# Altium PCB Sensor_Box_Water_Meter_Valve.PCBDOC (part 1 of 2)
Units mil, origin at the board's own origin, x right, y up, seen from the top; angles counter-clockwise.
Board outline 842.52 x 2866.14 mil, 2 copper layers (Top, Bot), stack 63.824 mil thick; 67 components, 54 nets, 224 pads, 112 vias.
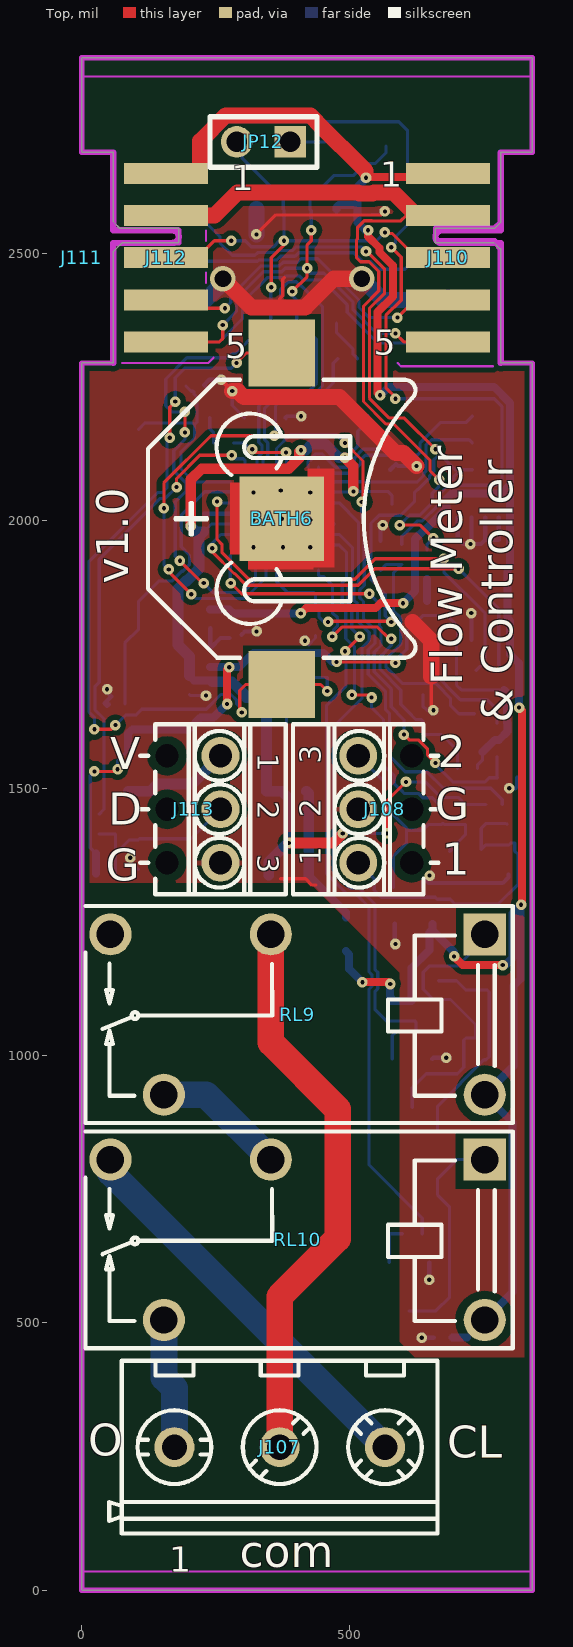
[diagram p0: Top view]
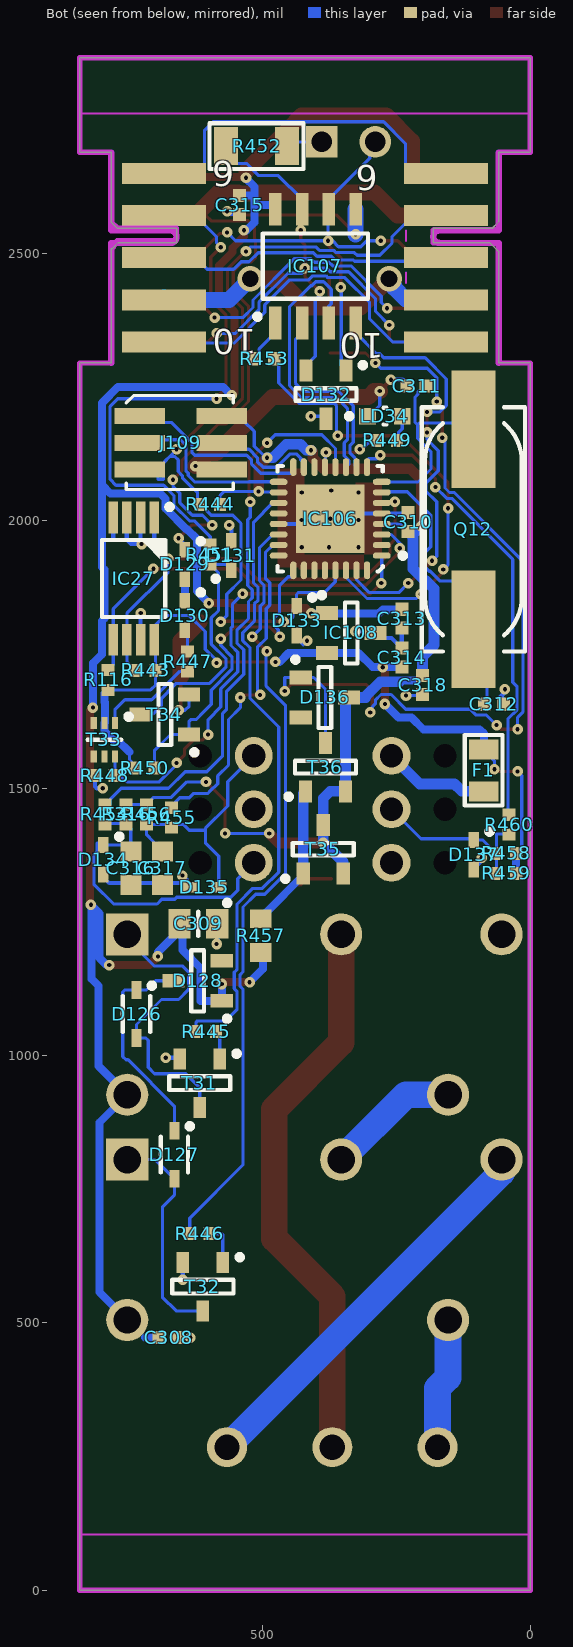
[diagram p1: Bot view, seen from below]
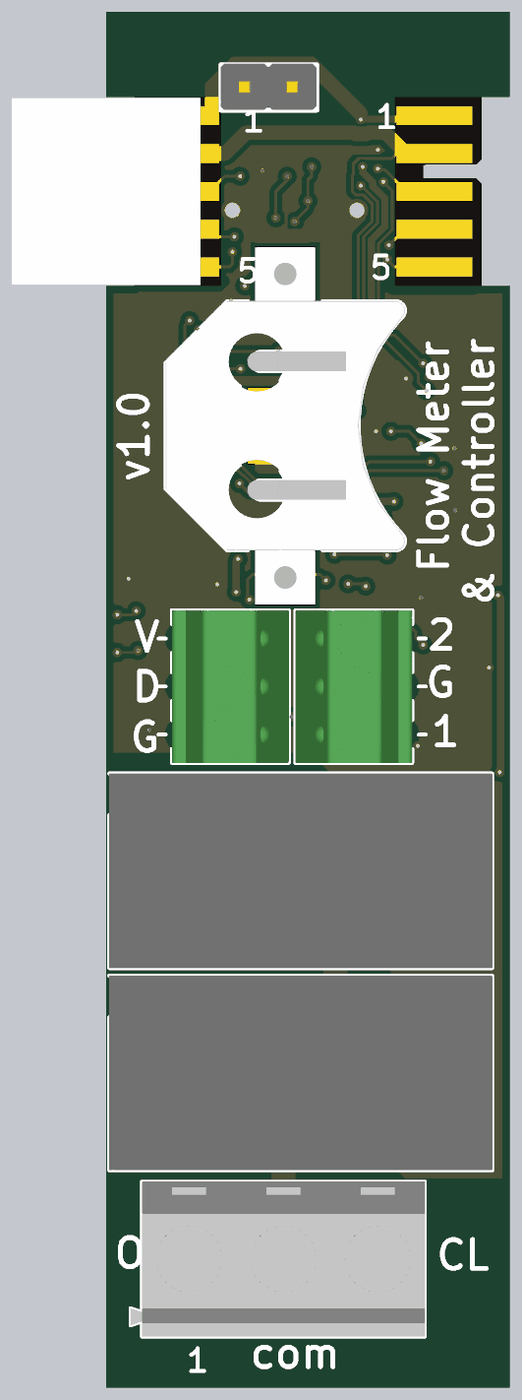
[diagram p2: 3D render of the assembled board from above, using the file's embedded part models]
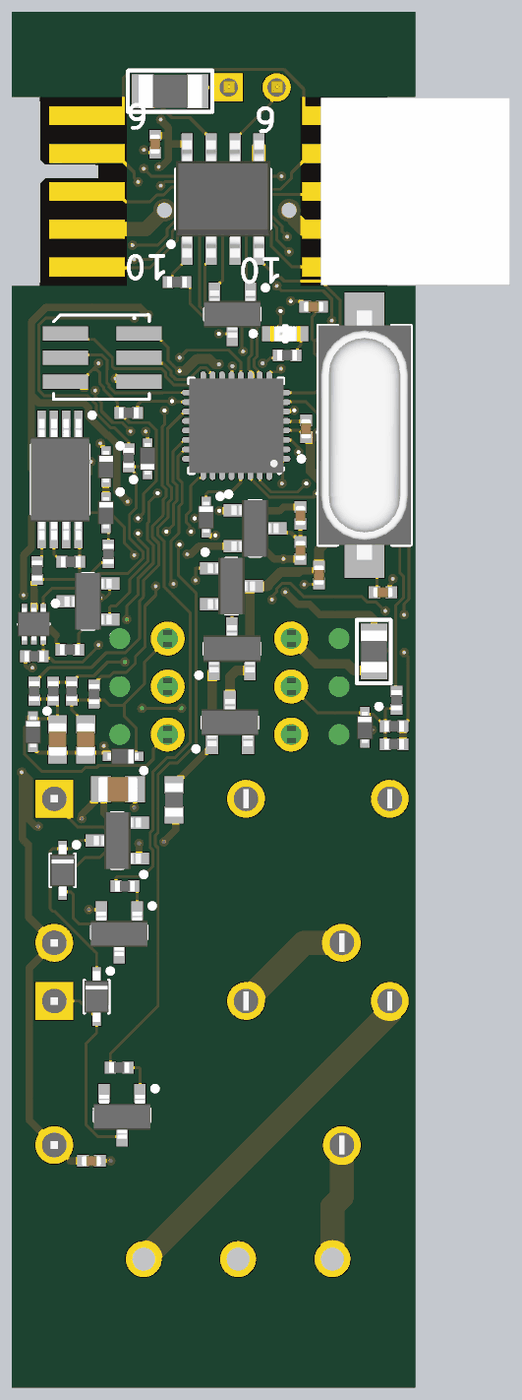
[diagram p3: 3D render of the assembled board from below, using the file's embedded part models]

## Layer stack, top to bottom
TopSolder: solder mask 0.4, Solder Resist, Dk 3.5
Top: signal copper 1.4
Dielectric1: core 61.0236, FR-4, Dk 4.8
Bot: signal copper 1.4
BottomSolder: solder mask 0.4, Solder Resist, Dk 3.5

## Board outline
0,0 0,5.9 0,5.91 0,1724.41 0,2295.27 59.06,2295.27 59.06,2503.94 74.8,2519.68 181.1,2519.68 181.1,2547.24 70.87,2547.24 59.06,2559.05 59.06,2688.98 0,2688.98 0,2866.14 842.52,2866.14 842.52,2688.98 783.47,2688.98 783.47,2559.05 771.65,2547.24 661.42,2547.24 661.42,2519.68 771.65,2519.68 779.53,2511.81 783.47,2507.87 783.47,2295.27 842.52,2295.27 842.52,0

## Design rules (kind name [scope] priority, off if disabled: settings)
Clearance Clearance_DIFF [(InDifferentialPairClass('All Differential Pairs'))] p1: gap=5 ignorepadtopadclearanceinfootprint=FALSE except(0: Arc-Hole Track-Hole SMDPad-Hole THPad-Hole Via-Hole Fill-Hole Poly-Hole Region-Hole Text-Hole; 10: Arc-Poly Track-Poly SMDPad-Poly THPad-Poly Via-Poly Fill-Poly Poly-Poly Poly-Region Poly-Text)
Clearance [All] p2: gap=5 ignorepadtopadclearanceinfootprint=FALSE except(0: Arc-Hole Track-Hole SMDPad-Hole THPad-Hole Via-Hole Fill-Hole Poly-Hole Region-Hole Text-Hole; 10: Arc-Poly Track-Poly SMDPad-Poly Via-Poly; 15: THPad-Poly Fill-Poly Poly-Poly)
DiffPairsRouting [All] p1: maxlimit=10 minlimit=5 mostfreqgap=5 toplayer_minwidth=5 toplayer_maxwidth=15 toplayer_prefwidth=10 bottomlayer_minwidth=5 bottomlayer_maxwidth=15 bottomlayer_prefwidth=10 maxuncoupledlength=500
FabricationTestPointUsage TestPointUsage [All] p1: valid=0 allowmultiple=FALSE
FabricationTestpoint Testpoint [All] p1: side=3 testpointundercomponent=TRUE minsize=40 maxsize=100 preferedsize=60 minholesize=20 maxholesize=40 preferedholesize=32 testpointgrid=1 allowsidetop=TRUE allowsidebottom=TRUE usegrid=TRUE gridtolerance=0.01
HoleSize [All] p1: absolutevalues=TRUE maxlimit=150 minlimit=1 maxpercent=80.000 minpercent=20.000
HoleToHoleClearance [All] p1: gap=1 allowstackedmicrovias=TRUE
MinimumSolderMaskSliver [All] p1: minsoldermaskwidth=0
PlaneClearance [All] p1: clearance=10
PlaneConnect [All] p1: planeconnectstyle=Direct reliefexpansion=20 reliefentries=4 reliefconductorwidth=10 reliefairgap=10
PolygonConnect PolygonConnect_pad [(InPadClass('All Pads'))] p1: connectstyle=Relief reliefconductorwidth=10 reliefentries=4 polygonreliefangle="90 Angle" airgapwidth=10
PolygonConnect [All] p2: connectstyle=Direct reliefconductorwidth=10 reliefentries=4 polygonreliefangle="45 Angle" airgapwidth=10
RoomDefinition Sensor_Box_Water_Meter_Valve [InComponentClass('Sensor_Box_Water_Meter_Valve')] p1 off: confinementstyle=ConfineIn formatcopy=TRUE lockcomponents=FALSE outline 5.91,133.86 415.35,133.86 415.35,1511.81 5.91,1511.81
RoutingVias [All] p1: holewidth=7.87 width=19.68 viastyle="Through Hole" minholewidth=7.87 minwidth=19.68 maxholewidth=28 maxwidth=50
SilkToSilkClearance [All] p1: silktosilkclearance=0
SilkToSolderMaskClearance SilkscreenOverComponentPads [IsPad] p1: minsilkscreentomaskgap=0 clearancetoexposedcopper=TRUE
SolderMaskExpansion [All] p1: expansion=2
Width [All] p1: maxlimit=50 minlimit=5 preferedwidth=5
20 further rules are at their usual default settings.

## Components (designator, comment, footprint, x,y, rotation, side; value= is the part's Value field where it differs from the comment)
BATH6 "=Value" BATH_KEYSTONE_3000 374.02,2003.94 r270 top locked
C308 "1uF" CAPC1005X55N 675.98,472.44 r180 bottom
C309 "10uF" CAPC2012X135N 620.67,1246.46 r180 bottom
C310 "100nF" CAPC1005X55N 228.34,1997.56 r270 bottom
C311 "18pF" CAPC1005X55N 212.6,2251.97 r180 bottom
C312 "18pF" CAPC1005X55N 68,1657 r0 bottom
C313 "1uF" CAPC1005X55N 240.15,1816.93 r90 bottom
C314 "1uF" CAPC1005X55N 240.16,1744.09 r270 bottom
C315 "100nF" CAPC1005X55N 543.31,2590.55 r270 bottom
C316 "10nF" CAPC1608X87N 746.72,1350.39 r90 bottom
C317 "10nF" CAPC1608X87N 687.8,1350.39 r90 bottom
C318 "1uF" CAPC1005X55N 201.31,1692.91 r90 bottom
D126 "1N4148WS" SODFL2512X100N 736.22,1077.75 r270 bottom
D127 "1N4148WS" SODFL2512X100N 665.35,814.63 r270 bottom
D128 "BZX84C15" SOT95P240X130-3N 622.05,1139.76 r0 bottom
D129 "PESD3V3S1UB" SODFL1608X65N 645.67,1918.5 r270 bottom
D130 "PESD3V3S1UB" SODFL1608X65N 645.67,1822.83 r270 bottom
D131 "PESD3V3S1UB" SODFL1608X65N 558.73,1935.04 r90 bottom
D132 "SM712" SOT95P237X112-3N 381.89,2236.22 r270 bottom
D133 "PESD3V3S1UB" SODFL1608X65N 437.01,1813.35 r270 bottom
D134 "PESD3V3S1UB" SODFL1608X65N 798.03,1366.14 r270 bottom
D135 "PESD3V3S1UB" SODFL1608X65N 609.98,1314.96 r0 bottom
D136 "BAT54" SOT95P240X130-3N 383.86,1669.66 r180 bottom
D137 "PESD3V3S1UB" SODFL1608X65N 105.66,1375.63 r270 bottom
F1 "RFSI050" 0805R 86.61,1533.46 r90 bottom
IC27 "M24256-BRDW6" SOP65P640X120-8N 741.47,1892.06 r270 bottom
IC106 "ATMEGA328PB-MU" QFN50P500X500X100-33N-S325 374.02,2003.94 r0 bottom
IC107 "ST485ECDR" SOIC127P600X175-8N 401.57,2476.38 r90 bottom
IC108 "AP7313-33SAG-7" SOT95P240X130-3N 334.65,1790.35 r180 bottom
J107 "=Family" TYCO_282836-3 370.08,267.72 r0 top
J108 "=Family" PHOENIX_1725669 517.03,1460.63 r90 top
J109 "ZL322-2X3P or PLHTD6S-TR-CV" ZL322-2X3P 653.54,2145.67 r270 bottom
J110 "=Family" EDGE10T5B10_P200W1000L0F100X400 685.04,2334.64 r90 top locked
J111 "=Family" "AVX_00 9159 010 061 916" 0,2492.13 r180 top
J112 "=Family" EDGE10T1B6_P200W1000L0F100X400 157.48,2649.61 r270 top locked
J113 "=Family" PHOENIX_1725669 259.41,1460.63 r270 top
JP12 "1798942 (goldpin 2x 2.54)" jump 389.76,2708.66 r270 top
LD34 "Green" LED_KINGBRIGHT_KPH-1608CGCK 271.65,2195.67 r180 bottom
Q12 "8.192MHz" XTAL_ABRACON_ABLS 106.3,1984.25 r270 bottom
R116 "10k" RESC1005X40N 789.37,1702.36 r90 bottom
R316 "100k" RESC1005X40N 755.91,1450.88 r90 bottom
R443 "10k" RESC1005X40N 719.29,1720.47 r0 bottom
R444 "10k" RESC1005X40N 598.43,2030.69 r0 bottom
R445 "1k" RESC1005X40N 606.3,1044.65 r180 bottom
R446 "1k" RESC1005X40N 618.11,666.89 r180 bottom
R447 "1k" RESC1005X40N 640.75,1736.94 r90 bottom
R448 "10k" RESC1005X40N 795.27,1523.62 r180 bottom
R449 "10k" RESC1005X40N 267.72,2150.59 r180 bottom
R450 "100k" RESC1005X40N 721.26,1537.4 r0 bottom
R451 "49R9" RESC1005X40N 598.43,1937.01 r270 bottom
R452 "120R" 1206R 511.81,2700.79 r180 bottom
R453 "1k" RESC1005X40N 497.34,2303.15 r0 bottom
R454 "1k" RESC1005X40N 795.28,1450.88 r90 bottom
R455 "1k" RESC1005X40N 670.48,1444.88 r90 bottom
R456 "100k" RESC1005X40N 717.32,1450.88 r90 bottom
R457 "10k" RESC1608X55N 503.94,1224.41 r270 bottom
R458 "10k" RESC1005X40N 44.68,1377.95 r180 bottom
R459 "10k" RESC1005X40N 44.68,1340.55 r180 bottom
R460 "49R9" RESC1005X40N 39.37,1431.9 r90 bottom
RL9 "REL_OMRON_G5Q-1" REL_OMRON_G5Q-1 403.54,1066.93 r180 top value=5VDC
RL10 "REL_OMRON_G5Q-1" REL_OMRON_G5Q-1 403.54,645.67 r180 top value=5VDC
T31 "BC817-25" SOT95P230X110-3N 618.11,948.49 r270 bottom
T32 "BC817-25" SOT95P230X110-3N 612.2,567.89 r270 bottom
T33 "BC857BV" SOTFL50P160X60-6N 796.26,1590.55 r270 bottom
T34 "BSS138LT1G" SOT95P240X110-3N 683.2,1637.8 r0 bottom
T35 "BSS138LT1G" SOT95P240X110-3N 387.01,1385.83 r90 bottom
T36 "Si2315BDS-T1-E3" SOT95P237X112-3N 382.87,1539.37 r90 bottom

## Footprints (in the part's own frame and the unit in brackets; to place one, negate y for a bottom-side part, rotate by r counter-clockwise, add the part's x,y. Pads: shape width x height; smd on the part's side, far side on the other; paste and mask are expansions set on the pad)
0805R [mm]
  rect 0.95x1.4 smd: 1(-1,0) 2(1,0)
  silkscreen extent -1.68,-0.89 1.68,0.91, body extent -1.1,-0.67 1.1,0.68, height 0.6
1206R [mm]
  rect 1.15x1.8 smd: 1(-1.45,0) 2(1.45,0)
  silkscreen extent -2.24,-1.09 2.24,1.09, body extent -1.67,-0.87 1.68,0.88, height 0.65
"AVX_00 9159 010 061 916" [mil] "10 Contacts, 2mm Pitch, Open Ended Card Edge Connector, 9159 Series"
  body extent -197,-195 197,195, height 67
BATH_KEYSTONE_3000 [mm] "SMD Battery Holder for BR1216, CR1216, BR1220, CL1220, CR1220, BR1225 Coin Cells"
  rect 3.175x3.175 smd: 1(-7.873,0) 1(7.873,0)
  rect 4x4 smd paste-2: 2(0,0)
  silkscreen extent -6.6,-6.35 6.6,6.35, body extent -9.46,-6.35 9.46,6.35, height 3.17
CAPC1005X55N [mm] "Chip Capacitor, Body 1.0x0.55mm, IPC Medium Density"
  rect 0.62x0.62 smd: 1(-0.45,0) 2(0.45,0)
  body extent -0.52,-0.27 0.53,0.28, height 0.55
CAPC1608X87N [mm] "Chip Capacitor, Body 1.6x0.8mm IPC Medium Density"
  rect 0.95x1 smd: 1(-0.8,0) 2(0.8,0)
  body extent -0.87,-0.47 0.88,0.48, height 0.87
CAPC2012X135N [mm] "Chip Capacitor, Body 2.0x1.25mm, IPC Medium Density"
  rect 1.05x1.4 smd: 1(-0.9,0) 2(0.9,0)
  silkscreen extent 0,-0.58 0,0.58, body extent -1.05,-0.67 1.05,0.68, height 1.25
EDGE10T1B6_P200W1000L0F100X400 [mm] "10 contacts Board Edge Connector, First Left Top Pad 1, First Left Bottom Pad 2, Pitch 2mm, Length 0mm, Width 10mm, Finger Lenght 4mm, Finger Width 1mm"
  rect 1x4 smd paste-0.5: 1(0,0) 2(2,0) 3(4,0) 4(6,0) 5(8,0)
  rect 1x4 smd far side paste-0.5: 6(0,0) 7(2,0) 8(4,0) 9(6,0) 10(8,0)
  KeepOutLayer lines w0.3: 9,-2.5 3.3,-2.5 3.3,0.3 ccw(c3,0.3) 2.7,0.3 2.7,-2.5 -1,-2.5
EDGE10T5B10_P200W1000L0F100X400 [mm] "10 contacts Board Edge Connector, First Left Top Pad 5, First Left Bottom Pad 10, Pitch 2mm, Length 0mm, Width 10mm, Finger Lenght 4mm, Finger Width 1mm"
  rect 1x4 smd paste-0.5: 1(8,0) 2(6,0) 3(4,0) 4(2,0) 5(0,0)
  rect 1x4 smd far side paste-0.5: 6(8,0) 7(6,0) 8(4,0) 9(2,0) 10(0,0)
  KeepOutLayer lines w0.3: -1,-2.5 4.7,-2.5 4.7,0.3 cw(c5,0.3) 5.3,0.3 5.3,-2.5 9,-2.5
jump [mm]
  rect 1.5x1.5 hole 0.965: 1(0,0)
  round 1.5 hole 0.965: 2(0,-2.54)
  silkscreen extent -1.2,-3.81 1.2,1.27, body extent -1.26,-3.84 1.19,1.24, height 8
LED_KINGBRIGHT_KPH-1608CGCK [mm] "SMT Green LED, Case 0603, Body L 1.6 x W 0.8mm H 0.65mm"
  rect 0.8x0.8 smd: 1(-0.825,0) 2(0.825,0)
  silkscreen extent -1.83,-0.4 0.08,0.4, body extent -0.8,-0.4 0.8,0.4, height 0.65
PHOENIX_1725669 [mm] "Micro PCB Terminal Block, Pitch 2.54mm, 3 Positions, Screw Connection"
  round 1.8 hole 1.1: 1(-2.54,0) 2(0,0) 3(2.54,0)
  round 0.5 hole 1.1 unplated mask+0.3: 4(-2.54,-2.54) 5(0,-2.54) 6(2.54,-2.54)
  silkscreen extent -4.04,-3.81 4.04,3.1, body extent -4.04,-3.1 4.04,3.1, height 8.5
QFN50P500X500X100-33N-S325 [mm] "QFN, (MO-220-VHHD-4) 0.50mm pitch,square; 8 pin X 8 pin, 5mm X 5mm X 1.00mm H body (w/thermal tab 3.25 X 3.25mm),  IPC Medium Density"
  oval 0.85x0.3 smd: 1(-2.45,1.75) 2(-2.45,1.25) 3(-2.45,0.75) 4(-2.45,0.25) 5(-2.45,-0.25) 6(-2.45,-0.75) 7(-2.45,-1.25) 8(-2.45,-1.75) 17(2.45,-1.75) 18(2.45,-1.25) 19(2.45,-0.75) 20(2.45,-0.25) 21(2.45,0.25) 22(2.45,0.75) 23(2.45,1.25) 24(2.45,1.75)
  oval 0.3x0.85 smd: 9(-1.75,-2.45) 10(-1.25,-2.45) 11(-0.75,-2.45) 12(-0.25,-2.45) 13(0.25,-2.45) 14(0.75,-2.45) 15(1.25,-2.45) 16(1.75,-2.45) 25(1.75,2.45) 26(1.25,2.45) 27(0.75,2.45) 28(0.25,2.45) 29(-0.25,2.45) 30(-0.75,2.45) 31(-1.25,2.45) 32(-1.75,2.45)
  rect 3.25x3.25 smd: 33(0,0)
  silkscreen extent -3.57,-2.5 2.5,2.5, body extent -2.5,-2.5 2.5,2.5, height 1
REL_OMRON_G5Q-1 [mm] "5 Leads, Row Spacing 7.62 mm; Body 20.3mm x 10.3mm OMRON_G5Q-1 Series"
  rect 2x2 hole 1.3: 1(-8.89,-4.06)
  round 2 hole 1.3: 2(1.27,-4.06) 3(8.89,-4.06) 4(6.35,3.56) 5(-8.89,3.56)
  silkscreen extent -10.22,-5.4 10.08,4.9, body extent -10.22,-5.4 10.08,4.9, height 16.2
RESC1005X40N [mm] "Chip Resistor, EIA 0402, Metric 1005, Body 1.0x0.5mm, IPC Medium Density"
  rect 0.58x0.62 smd: 1(-0.47,0) 2(0.47,0)
  body extent -0.52,-0.27 0.53,0.28, height 0.4
RESC1608X55N [mm] "Chip Resistor, EIA 0603, Metric 1608, Body 1.6x0.8mm, IPC Medium Density"
  rect 0.9x1 smd: 1(-0.8,0) 2(0.8,0)
  body extent -0.87,-0.47 0.88,0.48, height 0.55
SODFL1608X65N [mm] "Ultra Small Outline Diode Flat Lead (SOD-523), Body; 1.2mm L X 0.8mm W X 0.65mm H, IPC Medium Density"
  rect 0.75x0.5 smd: 1(-0.7,0) 2(0.7,0)
  silkscreen extent -1.22,0.63 -0.98,0.87, body extent -0.82,-0.42 0.83,0.43, height 0.65
SODFL2512X100N [mm] "SODFL Diode; 1.70mm W X 1.25mm L X 1.00mm H body, IPC Medium Density"
  rect 0.84x0.46 smd: 1(-1.14,0) 2(1.14,0)
  silkscreen extent -1.47,-0.65 0.85,0.85, body extent -1.35,-0.65 1.35,0.65, height 1
SOIC127P600X175-8N [mm] "SOIC 8, Pitch 1.27mm - Body 4x5mm, IPC Medium Density"
  rect 1.55x0.6 smd: 1(-2.7,1.905) 2(-2.7,0.635) 3(-2.7,-0.635) 4(-2.7,-1.905) 5(2.7,-1.905) 6(2.7,-0.635) 7(2.7,0.635) 8(2.7,1.905)
  silkscreen extent -2.52,-2.5 1.55,2.88, body extent -3.1,-2.5 3.1,2.5, height 1.75
SOP65P640X120-8N [mm] "SOP, 0.65mm pitch; 8 pin, 4.40mm W X 3.00mm L X 1.20mm H body, IPC Medium Density"
  rect 1.5x0.45 smd: 1(-2.9,0.975) 2(-2.9,0.325) 3(-2.9,-0.325) 4(-2.9,-0.975) 5(2.9,-0.975) 6(2.9,-0.325) 7(2.9,0.325) 8(2.9,0.975)
  silkscreen extent -3.52,-1.5 1.83,1.82, body extent -3.2,-1.55 3.2,1.55, height 1.2
SOT95P230X110-3N [mm] "SOT23, 3 pin, Pitch 0.95mm - 1.3mm W X 2.9mm L X 1.1mm H, IPC Medium Density"
  rect 1x0.6 smd: 1(-1.15,0.95) 2(-1.15,-0.95) 3(1.15,0)
  silkscreen extent -1.52,-1.45 0.33,1.87, body extent -1.08,-1.5 1.25,1.5, height 1.1
SOT95P237X112-3N [mm] "SOT, 0.95mm, pitch; 3 pin,1.30mm W X 2.92mm L X 1.12mm H body, IPC Medium Density"
  rect 1.05x0.6 smd: 1(-1.15,0.95) 2(-1.15,-0.95) 3(1.15,0)
  silkscreen extent -1.52,-1.45 0.3,1.87, body extent -1.25,-1.5 1.25,1.5, height 1.1
SOT95P240X110-3N [mm] "SOT23 3-Leads, Pitch 0.95mm, Body 1.3x2.9mm, IPC Medium Density"
  rect 1.05x0.65 smd: 1(-1.15,0.95) 2(-1.15,-0.95) 3(1.15,0)
  silkscreen extent -1.52,-1.45 0.3,1.92, body extent -1.25,-1.5 1.25,1.5, height 1.1
SOT95P240X130-3N [mm] "SOT23 3-Leads, Pitch 0.95mm - Body 1.3x2.9mm, IPC Medium Density"
  rect 1.05x0.65 smd: 1(-1.15,0.95) 2(-1.15,-0.95) 3(1.15,0)
  silkscreen extent -1.52,-1.45 0.3,1.92, body extent -1.25,-1.5 1.25,1.5, height 1.3
SOTFL50P160X60-6N [mm] "SOTFL (SOT666), 0.50mm, Pitch; 6 Pin, 1.20mm W X 1.60mm L X 0.60mm H Body, IPC Medium Density"
  rect 0.57x0.3 smd: 1(-0.79,0.5) 2(-0.79,0) 3(-0.79,-0.5) 4(0.79,-0.5) 5(0.79,0) 6(0.79,0.5)
  silkscreen extent -1.22,-0.8 0,1.27, body extent -0.85,-0.85 0.85,0.85, height 0.6
TYCO_282836-3 [mm] "15.5A, 300V, Terminal Block, Pitch 5mm, 3 Positions, Screw Connection"
  round 1.9 hole 1.2: 1(-5,0) 2(0,0) 3(5,0)
  silkscreen extent -8.1,-4.1 7.5,4.1, body extent -8.1,-4.1 7.5,4.1, height 10.01
XTAL_ABRACON_ABLS [mm] "HC/49US (AT49) SMD Cristal, Body 11.4x4.7mm, ABLS Serie"
  rect 5.6x2.1 smd: 1(-4.75,0) 2(4.75,0)
  silkscreen extent -5.8,-2.45 5.8,2.45, body extent -6.6,-2.45 6.6,2.45, height 4.2
ZL322-2X3P [mm] "SMT 1.27 mm dual goldpin"
  rect 0.76x2.4 smd: 1(-1.27,-1.95) 2(-1.27,1.95) 3(0,-1.95) 4(0,1.95) 5(1.27,-1.95) 6(1.27,1.95)
  silkscreen extent -2.25,-2.58 2.2,2.5, body extent -2.05,-2.15 2.03,2.15, height 4.5

## Part data
BATH6: library part BATH_KEYSTONE_3000, "Battery Holder whit 2 Pin", Manufacturer=KEYSTONE, Manufacturer Part Number=3000, Author="CERN DEM JLC", ComponentHeight=3.17mm, Component Type=Standard, CreateDate=17.04.2012, Family=Battery, HelpURL=\\cern.ch\dfs\Applications\Altium\Datasheets\BATH_KEYSTONE_3000.pdf, LatestRevisionDate=07.06.2017, Mounted=Yes, PackageDescription="SMD Battery Holder for CR1216, BR1220, CL1225, SR1120, D381, 391, 191 Coin Cells", Part Description="SMD Battery Holder for CR1216, BR1220, CL1225, SR1120, D381, 391, 191 Coin Cells", Part Number=BATH_KEYSTONE_3000, Pin Count=3, PressFit=No, Sense=No, SMD=Yes, Socket=No
C308 C313 C314 C318: library part CC0402_1UF_16V_10%_X5R, "Non-polarised capacitor", Case=0402, Manufacturer=GENERIC, Manufacturer1 ComponentHeight=0.55mm, Manufacturer1 Example=TDK, Manufacturer1 Part Number=C1005X5R1C105KT, Tolerance=±10%, Voltage=16V, Author="CERN DEM JLC", Component Type=Standard, CreateDate=25.10.2012, HelpURL=\\cern.ch\dfs\Applications\Altium\Datasheets\CC0402_X5R_TDK_C.pdf, LatestRevisionDate=25.10.2012, Manufacturer Part Number=CC0402_1UF_16V_10%_X5R, Mounted=Yes, Part Description="SMD Multilayer Chip Ceramic Capacitor", Part Number=CC0402_1UF_16V_10%_X5R, Pin Count=2, Sense=No, SMD=Yes, Socket=No, Status=Preferred, TC=X5R
C309: library part CC0805_10UF_16V_10%_X5R, "Non-polarised capacitor", Case=0805, Manufacturer=GENERIC, Manufacturer1 ComponentHeight=1.4mm, Manufacturer1 Example=KEMET, Manufacturer1 Part Number=C0805C106K4PAC, Tolerance=±10%, Voltage=16V, Author="CERN DEM JLC", Component Type=Standard, CreateDate=03.12.2007, HelpURL=\\cern.ch\dfs\Applications\Altium\Datasheets\CC1206_X5R_KEMET.pdf, LatestRevisionDate=03.12.2007, Manufacturer Part Number=CC0805_10UF_16V_10%_X5R, Mounted=Yes, Part Description="SMD Multilayer Chip Ceramic Capacitor", Part Number=CC0805_10UF_16V_10%_X5R, Pin Count=2, Sense=No, SMD=Yes, Socket=No, Status=Preferred, TC=X5R
C310: library part CC0402_100NF_16V_10%_X5R, "Non-polarised capacitor", Case=0402, Manufacturer=GENERIC, Manufacturer1 ComponentHeight=0.55mm, Manufacturer1 Example=MURATA, Manufacturer1 Part Number=GRM155R61C104KA88D, Tolerance=±10%, Voltage=16V, Author="CERN DEM JLC", Component Type=Standard, CreateDate=10.12.2013, HelpURL=\\cern.ch\dfs\Applications\Altium\Datasheets\CC0402_X5R_MURATA_GRM.pdf, LatestRevisionDate=10.12.2013, Manufacturer Part Number=CC0402_100NF_16V_10%_X5R, Mounted=Yes, Part Description="SMD Multilayer Chip Ceramic Capacitor", Part Number=CC0402_100NF_16V_10%_X5R, Pin Count=2, Sense=No, SMD=Yes, Socket=No, Status=None, TC=X5R
C311 C312: library part CC0402_18PF_50V_5%_C0G, "Non-polarised capacitor", Case=0402, Manufacturer=GENERIC, Manufacturer1 ComponentHeight=0.55mm, Manufacturer1 Example=KEMET, Manufacturer1 Part Number=C0402C180J5GACTU, Tolerance=±5%, Voltage=50V, Author="CERN DEM JLC", Component Type=Standard, CreateDate=04.10.2016, HelpURL="\\cern.ch\dfs\Applications\Altium\Datasheets\CC0805_C0G_KEMET_(Commercial Grade).pdf", LatestRevisionDate=04.10.2016, Manufacturer Part Number=CC0402_18PF_50V_5%_C0G, Mounted=Yes, Part Description="SMD Multilayer Chip Ceramic Capacitor", Part Number=CC0402_18PF_50V_5%_C0G, Pin Count=2, Sense=No, SMD=Yes, Socket=No, Status=Preferred, TC=C0G/NP0
C315: library part CC0402_100NF_16V_10%_X7R, "Non-polarised capacitor", Case=0402, Manufacturer=GENERIC, Manufacturer1 ComponentHeight=0.55mm, Manufacturer1 Example=MURATA, Manufacturer1 Part Number=GRM155R71C104KA88D, Tolerance=±10%, Voltage=16V, Author="CERN DEM JLC", Component Type=Standard, CreateDate=05.12.2013, HelpURL=\\cern.ch\dfs\Applications\Altium\Datasheets\CC0402_X7R_MURATA_GRM.pdf, LatestRevisionDate=03.12.2007, Manufacturer Part Number=CC0402_100NF_16V_10%_X7R, Mounted=Yes, Part Description="SMD Multilayer Chip Ceramic Capacitor", Part Number=CC0402_100NF_16V_10%_X7R, Pin Count=2, Sense=No, SMD=Yes, Socket=No, Status="Not Recommended", TC=X7R
C316 C317: library part CC0603_10NF_50V_5%_C0G, "Non-polarised capacitor", Case=0603, Manufacturer=GENERIC, Manufacturer1 ComponentHeight=0.9mm, Manufacturer1 Example=TDK, Manufacturer1 Part Number=C1608C0G1H103J080AA, Tolerance=±5%, Voltage=50V, Author="CERN DEM JLC", Component Type=Standard, CreateDate=10.12.2014, HelpURL=\\cern.ch\dfs\Applications\Altium\Datasheets\CC0603_C0G_TDK_C.pdf, LatestRevisionDate=10.12.2014, Manufacturer Part Number=CC0603_10NF_50V_5%_C0G, Mounted=Yes, Part Description="SMD Multilayer Chip Ceramic Capacitor", Part Number=CC0603_10NF_50V_5%_C0G, Pin Count=2, Sense=No, SMD=Yes, Socket=No, Status=Preferred, TC=C0G/NP0
D126 D127: "Diode", Case=SOD-323F, Manufacturer="FAIRCHILD SEMICONDUCTOR", Power=150mA, Voltage=75V, Author="CERN DEM JLC", Bonding=No, ComponentHeight=1mm, Component Type=Standard, CreateDate=12.05.2011, Device=1N4148WS, HelpURL=\\cern.ch\dfs\Applications\Altium\Datasheets\1N4148WS.pdf, LatestRevisionDate=12.05.2011, Manufacturer Part Number=1N4148WS, Mounted=Yes, PackageDescription="SODFL Diode; 1.70mm W X 1.25mm L X 1.00mm H body, IPC Medium Density", Part Description="Small Signal Diodes", Part Number=1N4148WS, Pin Count=2, PressFit=No, Sense=No, SMD=Yes, Socket=No
D128: "Diode Zener Anode Pin 1 Cathode Pin 3 (Pas de pin 2)", Case=SOT23-3, Manufacturer="FAIRCHILD SEMICONDUCTOR", Power=350mW, Voltage=15V, Author="CERN DEM JLC", Bonding=No, ComponentHeight=1.3mm, Component Type=Standard, CreateDate=30.11.2011, Device=BZX84C15, HelpURL=\\cern.ch\dfs\Applications\Altium\Datasheets\BZX84C15.pdf, LatestRevisionDate=30.11.2011, Manufacturer Part Number=BZX84C15, Mounted=Yes, PackageDescription="SOT23 3-Leads, Pitch 0.95mm - Body 1.3x2.9mm, IPC Medium Density", Part Description="Zener Diode", Part Number=BZX84C15, Pin Count=3, PressFit=No, Sense=No, SMD=Yes, Socket=No
D129 D130 D131 D133 D134 D135 D137: "ESD protection diode", Case=SOD523, Manufacturer="NXP SEMICONDUCTORS", Power=330W, Voltage=3V3, Author="CERN DEM JLC", Bonding=No, ComponentHeight=0.65mm, Component Type=Standard, CreateDate=29.11.2012, Device=PESD3V3S1UB, HelpURL=\\cern.ch\dfs\Applications\Altium\Datasheets\PESD3V3S1UB.pdf, LatestRevisionDate=29.11.2012, Manufacturer Part Number=PESD3V3S1UB, Mounted=Yes, PackageDescription="Ultra Small Outline Diode Flat Lead (SOD-523), Body; 1.2mm L X 0.8mm W X 0.65mm H, IPC Medium Density", Part Description="ESD protection diode (23kV)", Part Number=PESD3V3S1UB, Pin Count=2, PressFit=No, Sense=No, SMD=Yes, Socket=No
D132: "Asymmetrical TVS Diode for Extended Common-Mode RS-485", Case=SOT-23, Manufacturer=SEMTECH, Power=400W, Voltage=12V/-7V, Author="CERN DEM JLC", Bonding=No, ComponentHeight=1.12mm, Component Type=Standard, CreateDate=23.04.2012, Device=SM712, HelpURL=\\cern.ch\dfs\Applications\Altium\Datasheets\SM712.pdf, LatestRevisionDate=23.04.2012, Manufacturer Part Number=SM712, Mounted=Yes, PackageDescription="SOT, 0.95mm, pitch; 3 pin,1.30mm W X 2.92mm L X 1.12mm H body, IPC Medium Density", Part Description="Asymmetrical TVS Diode for Extended Common-Mode RS-485", Part Number=SM712, Pin Count=3, PressFit=No, Sense=No, SMD=Yes, Socket=No, Status=Obsolete
D136: "Diode Schottky  Anode Pin 1 Cathode Pin 3 (Pas de pin 2)", Case=SOT23-3, Manufacturer="FAIRCHILD SEMICONDUCTOR", Power=200mA, Voltage=30V, Author="CERN DEM JLC", Bonding=No, ComponentHeight=1.30mm, Component Type=Standard, CreateDate=2009-09-17, Device=BAT54, HelpURL=\\cern.ch\dfs\Applications\Altium\Datasheets\BAT54.pdf, LatestRevisionDate=2010-05-27, Manufacturer Part Number=BAT54, Mounted=Yes, PackageDescription="SOT23 3-Leads, Pitch 0.95mm - Body 1.3x2.9mm, IPC Medium Density", Part Description="Single Small Signal Schottky Diode", Part Number=BAT54, Pin Count=3, PressFit=No, Sense=No, SMD=Yes, Socket=No
F1: library part F_PTC_0.05A, "50mA polymer FUSE"
IC27: "256-Kbit Serial I²C Bus EEPROM", Case=TSSOP8, Manufacturer="ST MICROELECTRONICS", Part Number=M24256-BRDW6P, Author="CERN DEM MR", Bonding=No, ComponentHeight=1.2mm, Component Type=Standard, CreateDate=17.03.2016, Device=M24256-BRDW6, HelpURL=\\cern.ch\dfs\Applications\Altium\Datasheets\M24256-BRDW6P.pdf, LatestRevisionDate=17.03.2016, Manufacturer Part Number=M24256-BRDW6, Mounted=Yes, PackageDescription="SOP, 0.65mm pitch; 8 pin, 4.40mm W X 3.00mm L X 1.20mm H body, IPC Medium Density", Part Description="256-Kbit Serial I²C Bus EEPROM", Pin Count=8, PressFit=No, Sense=No, SMD=Yes, Socket=No
IC106: "8-bit AVR 20MHz Microcontroller With 32K Bytes In-System  Programmable  Flash", Case=QFN32, Manufacturer=ATMEL, Author=GK, Bonding=No, ComponentHeight=1mm, Component Type=Standard, CreateDate=2011-02-08, Device=ATMEGA328PB-MU, HelpURL=\\cern.ch\dfs\Applications\Altium\Datasheets\ATMEGA328P-MU.pdf, LatestRevisionDate=2014-07-02, Manufacturer Part Number=ATMEGA328PB-MU, Mounted=Yes, PackageDescription="QFN, (MO-220-VHHD-2) 0.50mm pitch,square; 8 pin X 8 pin, 5mm X 5mm X 1.00mm H body (w/thermal tab 3.25 X 3.25mm),  IPC Medium Density", Part Description="8-bit AVR Microcontroller, 32KB Flash, 1KB EEPROM, 2KB SRAM, 32-pin MLF, Industrial Grade (-40°C to 85°C)", Part Number=ATMEGA328PB-MU, Pin Count=33, PressFit=No, Sense=No, SMD=Yes, Socket=No
IC107: "±15kV ESD-Protected, Low Power  RS-485/RS-422 Transceiver", Case=SOIC8, Manufacturer="ST MICROELECTRONICS", Author="CERN DEM MR", Bonding=No, ComponentHeight=1.75mm, Component Type=Standard, CreateDate=15.02.2018, Device=ST485ECDR, HelpURL=\\cern.ch\dfs\Applications\Altium\Datasheets\ST485ECDR.pdf, LatestRevisionDate=15.02.2018, Manufacturer Part Number=ST485ECDR, Mounted=Yes, PackageDescription="SOIC 8, Pitch 1.27mm - Body 4x5mm, IPC Medium Density", Part Description="±15kV ESD-Protected, Low Power  RS-485/RS-422 Transceiver", Part Number=ST485ECDR, Pin Count=8, PressFit=No, Sense=No, SMD=Yes, Socket=No
IC108: "3-Terminal Regulator 1=IN 2=OUT 3=GND", Case=SOT23, Manufacturer="DIODES INCORPORATED", Author="CERN DEM JLC", Bonding=No, ComponentHeight=1.35mm, Component Type=Standard, CreateDate=20.03.2018, Device=AP7313-33SAG-7, HelpURL=\\cern.ch\dfs\Applications\Altium\Datasheets\AP7313-33SAG-7.pdf, LatestRevisionDate=20.03.2018, Manufacturer Part Number=AP7313-33SAG-7, Mounted=Yes, PackageDescription="SOT23 3-Leads, Pitch 0.95mm - Body 1.3x2.9mm, IPC Medium Density", Part Description="3.3V, 150mA Low Quiescent Current, Fast Transient Low Dropout Linear Regulator", Part Number=AP7313-33SAG-7, Pin Count=3, PressFit=No, Sense=No, SMD=Yes, Socket=No
J107: "Terminal Block, 3 Positions, Screw Connection", Manufacturer="TYCO ELECTRONICS", Manufacturer Part Number=282836-3, Part Number=TYCO_282836-3, Author=GK, ComponentHeight=10mm, Component Type=Standard, CreateDate=10.11.2014, HelpURL=\\cern.ch\dfs\Applications\Altium\Datasheets\TYCO_282836-4.pdf, LatestRevisionDate=10.11.2014, Mounted=Yes, Part Description="15.5A, 300V, Terminal Block, Pitch 5mm, 3 Positions, Screw Connection", Pin Count=4, PressFit=No, Sense=No, SMD=No, Socket=No, Status=None
J108 J113: library part PHOENIX_1725669, "Terminal Block, 3 Positions, Screw Connection", Manufacturer="PHOENIX CONTACT", Manufacturer Part Number="1725669 (MPT 0,5/3-2,54)", Author="CERN DEM JMW", ComponentHeight=8.5mm, Component Type=Standard, CreateDate=07.11.2008, HelpURL=\\cern.ch\dfs\Applications\Altium\Datasheets\PHOENIX_1725669.pdf, LatestRevisionDate=26.04.2010, Mounted=Yes, Part Description="6A, 63V, Terminal Block, Pitch 2.54mm, 3 Positions, Screw Connection", Part Number=PHOENIX_1725669, Pin Count=3, PressFit=No, Sense=No, SMD=No, Socket=No, Status=None
J109: library part "CON_2x3 1.27 SMT Male", "1.27 mm dual row goldpin (Maritex)"
J110: library part EDGE10T5B10_P200W1000L0F100X400, "PCB Edge Connector 10 (2x5)", Author="CERN DEM MR", ComponentHeight=0mm, Component Type="Standard (No BOM)", CreateDate=14.02.2018, HelpURL=\\cern.ch\dfs\Applications\Altium\Datasheets\EDGE10T5B10_P200W1000L0F100X400.pdf, LatestRevisionDate=14.02.2018, Mounted=No, Part Description="10 Contacts Board Edge Connector, Pitch 2mm, Length 0mm, Width 10mm, Finger Lenght 4mm, Finger Width 1mm", Part Number=EDGE10T5B10_P200W1000L0F100X400, Pin Count=10, PressFit=No, Sense=No, SMD=No, Socket=No, Status=None
J111: library part "AVX_00 9159 010 061 916", "Open Ended Card Edge Connector, 9159 Series", Manufacturer=AVX, Manufacturer Part Number="00 9159 010 061 916", Author="CERN DEM MR", ComponentHeight=1.6mm, Component Type=Standard, CreateDate=13.02.2018, HelpURL="\\cern.ch\dfs\Applications\Altium\Datasheets\AVX_00 9159 010 061 916.pdf", LatestRevisionDate=13.02.2018, Mounted=Yes, Part Description="10 Contacts, 2mm Pitch, Open Ended Card Edge Connector, 9159 Series", Part Number="AVX_00 9159 010 061 916", Pin Count=10, PressFit=No, Sense=No, SMD=No, Socket=No, Status=None
J112: library part EDGE10T1B6_P200W1000L0F100X400, "PCB Edge Connector 10 (2x5)", Author="CERN DEM MR", ComponentHeight=0mm, Component Type="Standard (No BOM)", CreateDate=14.02.2018, HelpURL=\\cern.ch\dfs\Applications\Altium\Datasheets\EDGE10T1B6_P200W1000L0F100X400.pdf, LatestRevisionDate=14.02.2018, Mounted=No, Part Description="10 Contacts Board Edge Connector, Pitch 2mm, Length 0mm, Width 10mm, Finger Lenght 4mm, Finger Width 1mm", Part Number=EDGE10T1B6_P200W1000L0F100X400, Pin Count=10, PressFit=No, Sense=No, SMD=No, Socket=No, Status=None
JP12: library part JUMPER, "Jumper", Supplier Part Number 1=1798942, Supplier 1=Farnell
LD34: library part LED_KINGBRIGHT_KPH-1608CGCK, "LED Green 1C 2A", Manufacturer=KINGBRIGHT, Manufacturer Part Number=KPH-1608CGCK, Author="CERN DEM JLC", Bonding=No, Color=Green, ComponentHeight=0.65mm, Component Type=Standard, CreateDate=03.07.2017, HelpURL=\\cern.ch\dfs\Applications\Altium\Datasheets\LED_KINGBRIGHT_KPH-1608CGCK.pdf, LatestRevisionDate=03.07.2017, Mounted=Yes, PackageDescription="SMT Green LED, Case 0603, Body L 1.6 x W 0.8mm H 0.65mm", Part Description="SMD Green LED, Case 1.6mmX0.8mm(0603), 0.65mm Thickness", Part Number=LED_KINGBRIGHT_KPH-1608CGCK, Pin Count=2, PressFit=No, Sense=No, SMD=Yes, Socket=No
Q12: library part XTAL_8.192MHZ_ABRACON_ABLS-8.192MHZ-B2-T, "Quartz Crystal", Manufacturer=ABRACON, Manufacturer Part Number=ABLS-8.192MHZ-B2-T, Author="CERN DEM MR", Bonding=No, ComponentHeight=4.2mm, Component Type=Standard, CreateDate=15.02.2018, HelpURL=\\cern.ch\dfs\Applications\Altium\Datasheets\XTAL_ABRACON_ABLS.pdf, LatestRevisionDate=15.02.2018, Mounted=Yes, PackageDescription="SMD Crystal, Body 11.40mm L X 4.70mm W X 4.20mm H, HC/49US (AT49) ALBS Series", Part Description="Tolerance: ± 20ppm, Stability: ± 50ppm, -20°C to +70°C, 18pF, 80 Ohms ESR, Low Profile Surface Mount Microprocessor Crystal, ABLS Series", Part Number=XTAL_8.192MHZ_ABRACON_ABLS-8.192MHZ-B2-T, Pin Count=2, PressFit=No, Sense=No, SMD=Yes, Socket=No
R116 R443 R444 R448 R449 R458 R459: library part R0402_10K_1%_0.0625W_100PPM, "Resistor - 1%", Case=0402, Manufacturer=GENERIC, Manufacturer1 ComponentHeight=0.4mm, Manufacturer1 Example="YAGEO PHYCOMP", Manufacturer1 Part Number=232270671003L, Power=0.0625W, Tolerance=±1%, Author="CERN DEM JLC", Component Type=Standard, HelpURL=\\cern.ch\dfs\Applications\Altium\Datasheets\R0402_Phycomp_RC0402.pdf, Manufacturer Part Number=R0402_10K_1%_0.0625W_100PPM, Mounted=Yes, Part Description="General Purpose Thick Film Chip Resistor", Part Number=R0402_10K_1%_0.0625W_100PPM, Pin Count=2, SMD=Yes, Socket=No, TC=±100ppm/°C
  R116 R443 R444 R448 R449: CreateDate=03.12.2007, LatestRevisionDate=17.10.2012, PressFit=No, Sense=No, Status="Not Recommended"
  R458 R459: CreateDate=2007-12-03, LatestRevisionDate=2012-10-17, Status="Not recommended", Table="Resistors SMD"
R316 R450 R456: library part R0402_100K_1%_0.0625W_100PPM, "Resistor - 1%", Case=0402, Manufacturer=GENERIC, Manufacturer1 ComponentHeight=0.4mm, Manufacturer1 Example="YAGEO PHYCOMP", Manufacturer1 Part Number=232270671004L, Power=0.0625W, Tolerance=±1%, Author="CERN DEM JLC", Component Type=Standard, CreateDate=03.12.2007, HelpURL=\\cern.ch\dfs\Applications\Altium\Datasheets\R0402_Phycomp_RC0402.pdf, LatestRevisionDate=17.10.2012, Manufacturer Part Number=R0402_100K_1%_0.0625W_100PPM, Mounted=Yes, Part Description="General Purpose Thick Film Chip Resistor", Part Number=R0402_100K_1%_0.0625W_100PPM, Pin Count=2, PressFit=No, Sense=No, SMD=Yes, Socket=No, Status="Not Recommended", TC=±100ppm/°C
R445 R446 R447 R453 R454 R455: library part R0402_1K_1%_0.0625W_100PPM, "Resistor - 1%", Case=0402, Manufacturer=GENERIC, Manufacturer1 ComponentHeight=0.4mm, Manufacturer1 Example="YAGEO PHYCOMP", Manufacturer1 Part Number=232270671002L, Power=0.0625W, Tolerance=±1%, Author="CERN DEM JLC", Component Type=Standard, CreateDate=03.12.2007, HelpURL=\\cern.ch\dfs\Applications\Altium\Datasheets\R0402_Phycomp_RC0402.pdf, LatestRevisionDate=17.10.2012, Manufacturer Part Number=R0402_1K_1%_0.0625W_100PPM, Mounted=Yes, Part Description="General Purpose Thick Film Chip Resistor", Part Number=R0402_1K_1%_0.0625W_100PPM, Pin Count=2, PressFit=No, Sense=No, SMD=Yes, Socket=No, Status="Not Recommended", TC=±100ppm/°C
R451 R460: library part R0402_49R9_1%_0.0625W_100PPM, "Resistor - 1%", Case=0402, Manufacturer=GENERIC, Manufacturer1 ComponentHeight=0.4mm, Manufacturer1 Example="YAGEO PHYCOMP", Manufacturer1 Part Number="232270674999L or RC0402FR-0749R9L", Power=0.0625W, Tolerance=±1%, Author="CERN DEM JLC", Component Type=Standard, CreateDate=2012-10-24, HelpURL=\\cern.ch\dfs\Applications\Altium\Datasheets\R0402_Phycomp_RC0402.pdf, LatestRevisionDate=2012-10-24, Manufacturer Part Number=R0402_49R9_1%_0.0625W_100PPM, Mounted=Yes, Part Description="General Purpose Thick Film Chip Resistor", Part Number=R0402_49R9_1%_0.0625W_100PPM, Pin Count=2, SMD=Yes, Socket=No, Status="Not recommended", Table="Resistors SMD", TC=±100ppm/°C
R452: library part RES_1206, "SMD Resistor", Supplier Part Number 1=39K0871, Supplier 1=Newark
R457: library part R0603_10K_1%_0.1W_100PPM, "Resistor - 1%", Case=0603, Manufacturer=GENERIC, Manufacturer1 ComponentHeight=0.55mm, Manufacturer1 Example="NIC COMPONENT", Manufacturer1 Part Number=NRC06F1002TRF, Power=0.1W, Tolerance=±1%, Author="CERN DEM JLC", Component Type=Standard, CreateDate=2007-12-03, HelpURL=\\cern.ch\dfs\Applications\Altium\Datasheets\R0603_NIC_NRC.pdf, LatestRevisionDate=2008-03-13, Manufacturer Part Number=R0603_10K_1%_0.1W_100PPM, Mounted=Yes, Part Description="General Purpose Thick Film Chip Resistor", Part Number=R0603_10K_1%_0.1W_100PPM, Pin Count=2, Sense=No, SMD=Yes, Socket=No, Status=Preferred, TC=±100ppm/°C
RL9 RL10: library part REL_OMRON_G5Q-1-5VDC, "SPDT, Power Relay, 10A Switching Capacity, G5Q-1 Series", Manufacturer="OMRON ELECTRONIC", Manufacturer Part Number=G5Q-1-DC5, Author="CERN DEM MR", ComponentHeight=15.8mm, Component Type=Standard, CreateDate=09.06.2016, HelpURL=\\cern.ch\dfs\Applications\Altium\Datasheets\REL_OMRON_G5Q-1.pdf, LatestRevisionDate=09.06.2016, Mounted=Yes, PackageDescription="5 Leads, Row Spacing 7.62mm; Body 20.3mm x 10.3mm, OMRON_G5Q-1 Series", Part Description="SPDT, Power Relay, 10A Switching Capacity, G5Q-1 Series", Part Number=REL_OMRON_G5Q-1-5VDC, Pin Count=5, PressFit=No, Sense=No, SMD=No, Socket=No, Status=None
T31 T32: "NPN Transistor", Case=SOT23-3, Manufacturer="NXP SEMICONDUCTORS", Author="CERN DEM JLC", Bonding=No, ComponentHeight=1.1mm, Component Type=Standard, CreateDate=28.10.2014, Device=BC817-25, HelpURL=\\cern.ch\dfs\Applications\Altium\Datasheets\BC817-25.pdf, LatestRevisionDate=28.10.2014, Manufacturer Part Number=BC817-25, Mounted=Yes, PackageDescription="SOT23, 3 pin, Pitch 0.95mm - 1.3mm W X 2.9mm L X 1.1mm H, IPC Medium Density", Part Description="45V 500mA NPN General-Purpose Transistor", Part Number=BC817-25, Pin Count=3, PressFit=No, Sense=No, SMD=Yes, Socket=No
T33: "45V, 100mA PNP General Purpose Double Transistor", Case=SOT666, Manufacturer="NXP SEMICONDUCTORS", Author="CERN DEM JLC", Bonding=No, ComponentHeight=0.6mm, Component Type=Standard, CreateDate=01.12.2011, Device=BC857BV, HelpURL=\\cern.ch\dfs\Applications\Altium\Datasheets\BC857BV.pdf, LatestRevisionDate=01.12.2011, Manufacturer Part Number=BC857BV, Mounted=Yes, PackageDescription="SOTFL (SOT666), 0.50mm, Pitch; 6 Pin, 1.20mm W X 1.60mm L X 0.60mm H Body, IPC Medium Density", Part Description="-45V -100mA PNP General Purpose Double Transistor", Part Number=BC857BV, Pin Count=6, PressFit=No, Sense=No, SMD=Yes, Socket=No
T34 T35: "N-CHANNEL MOSFET WITH DIODE", Case=SOT23-3, Manufacturer="ON SEMICONDUCTOR", Author="CERN DEM JLC", Bonding=No, ComponentHeight=1.11mm, Component Type=Standard, Device=BSS138LT1G, HelpURL=\\cern.ch\dfs\Applications\Altium\Datasheets\BSS138LT1G.pdf, Manufacturer Part Number=BSS138LT1G, Mounted=Yes, PackageDescription="SOT23 3-Leads, Pitch 0.95mm - Body 1.4x3mm, IPC Medium Density", Part Description="50V 200mA N-Channel Enhancement Mode Field-Effect Transistor", Part Number=BSS138LT1G, Pin Count=3, PressFit=No, Sense=No, SMD=Yes, Socket=No
  T34: CreateDate=23.03.2009, LatestRevisionDate=23.03.2009
  T35: CreateDate=2009-03-23, LatestRevisionDate=2009-03-23
T36: "P-CHANNEL MOSFET WITH DIODE", Case=SOT23-3, Manufacturer="VISHAY SILICONIX", Author="CERN DEM JLC", Bonding=No, ComponentHeight=1.12mm, Component Type=Standard, CreateDate=02.05.2011, Device=Si2315BDS-T1-E3, HelpURL=\\cern.ch\dfs\Applications\Altium\Datasheets\Si2315BDS-T1-E3.pdf, LatestRevisionDate=02.05.2011, Manufacturer Part Number=Si2315BDS-T1-E3, Mounted=Yes, PackageDescription="SOT, 0.95mm, pitch; 3 pin,1.30mm W X 2.92mm L X 1.12mm H body, IPC Medium Density", Part Description="-12V -3A P-Channel STripFET® II Power MOSFET", Part Number=Si2315BDS-T1-E3, Pin Count=3, PressFit=No, Sense=No, SMD=Yes, Socket=No

## Via types
v1: diameter 19.68, hole 7.87, Top to Bot, tented both sides, 110 vias
v2: diameter 47.24, hole 31.5, Top to Bot, tented both sides, 2 vias

## Nets (pads, with @x,y where several pads share a name; then routed paths per layer and width w, separated by ;. In a path a pad name is that pad's centre, name@x,y a point inside that pad or via, vN(x,y) a via of type N, cw(c..) or ccw(c..) an arc to the next point about the centre after c; other vN are vias at no path point)
1WIRE: IC106.9 R460.2 | length 869.5
  Top w6: v1(177.17,2063.16) 177.17,2079.02 220.7,2122.56 v1(280.59,2122.56)
  Bot w6: R460.2@32.57,1451.57 41.46,1460.47 41.46,1630.1 24.57,1646.99 24.57,1690.07 32.57,1698.07 32.57,1927.88 146.72,2042.02 156.03,2042.02 v1(177.17,2063.16) ; v1(280.59,2122.56) 287.14,2116.01 302.32,2116.01 305.12,2113.21 IC106.9
Close: J107.3 RL10.3 | length 750.4
  Bot w50: RL10.3 53.54,781.1 J107.3
COM: J107.2 RL9.2 | length 1055.7
  Top w50: RL9.2 353.54,1024.58 478.47,899.66 478.47,657.61 370.08,549.21 J107.2
CONT1: IC106.12 R454.2 | length 1073.1
  Top w6: v1(492.13,2145.67) 525.87,2111.92 525.87,2037.69 v1(523.62,2035.43)
  Bot w6: IC106.12 364.05,2100.52 364.05,2135.34 389.83,2161.13 476.66,2161.13 v1(492.13,2145.67) ; v1(523.62,2035.43) 523.62,2006.7 528.21,2002.12 528.21,1879.13 519.93,1870.85 519.93,1856.07 526.77,1849.23 526.77,1817.16 548.53,1795.41 548.53,1771.51 535.77,1758.76 535.77,1713.19 567.74,1681.22 567.74,1647.42 575.26,1639.9 575.26,1560.46 604.74,1530.97 645.44,1530.97 676.41,1500 764.66,1500 786.33,1478.33 R454.2@786.33,1469.38
CONT2: IC106.23 R455.2 | length 626.9
  Top w6: v1(505.12,1674.41) 537.17,1674.41 v1(541.93,1669.66)
  Bot w6: IC106.23 481.3,1954.73 495.21,1940.82 495.21,1892.8 486.93,1884.52 486.93,1842.4 493.77,1835.56 493.77,1780.05 510.25,1763.57 510.25,1679.54 v1(505.12,1674.41) ; v1(541.93,1669.66) 541.93,1650.76 564.26,1628.43 564.26,1543.18 584.38,1523.06 584.38,1508.49 598.91,1493.97 602.61,1490.28 629.31,1490.28 637.43,1482.16 655.33,1482.16 R455.2@666.22,1471.26
DEV_RESETn: IC106.25 R450.1 T34.1 | length 610.4
  Top w6: v1(468.5,1783.46) 486.35,1801.3 553.02,1801.3 574.8,1779.52 v1(578.74,1779.52)
  Bot w6: IC106.25 442.91,1898.23 445.6,1895.54 452.52,1895.54 468.62,1879.44 468.62,1828.26 478.47,1818.41 478.47,1803.63 471.12,1796.28 471.12,1786.08 v1(468.5,1783.46) ; v1(578.74,1779.52) 578.74,1767.17 557.77,1746.2 557.77,1722.31 596.52,1683.56 596.52,1656.8 610.42,1642.9 624.96,1628.36 634.65,1628.36 637.92,1625.09 T34.1 672.62,1600.39 702.76,1570.25 R450.1
GND: BATH6.2 C308.2 C309.2 C310.1 C311.1 C312.1 C313.1 C314.1 C315.2 C316.1 C317.1 C318.1 D131.2 D132.3 D133.2 D134.2 D135.2 D137.2 IC27.1 IC27.2 IC27.3 IC27.4 IC27.7 IC106.5 IC106.21 IC106.33 IC107.5 IC108.3 J108.2 J109.6 J110.9 J112.9 J113.3 LD34.1 R448.1 T31.2 T32.2 T34.2 | length 3020.7
  Top w6: v1(326.57,2535.63) 363.09,2572.14 560.34,2572.14 v1(566.93,2578.74) ; 370.08,2415.35 375.86,2421.13 375.86,2452.08 378.63,2454.85 ; 372.17,1330.71 418.61,1330.71 430.42,1318.9 437.81,1318.9 ; 653.54,1708.66 653.54,1649.61 v1(657.48,1645.67)
  Top w8: v1(260.37,2263.78) v1(281.39,2242.76)
  Top w30: v2(263.78,2452.75) 317.24,2399.29 417.87,2399.29 471.34,2452.75 v2(523.62,2452.75) ; v1(281.39,2242.76) 291.85,2242.76 303.23,2231.38 482.35,2231.38 587.12,2126.6 601.74,2126.6 v1(625.98,2102.36) ; 618.11,1811.02 653.54,1775.59 653.54,1708.66
  Bot w6: v1(90.55,1370.08) 90.55,1363.18 D137.2 ; C318.1 203.28,1673.23 v1(232.28,1673.23) ; v1(281.39,2242.76) 281.39,2215.66 LD34.1@304.13,2192.91 ; D132.3 379.92,2192.91 382.68,2195.67 v1(410.16,2195.67) ; v1(417.32,1775.59) 424.46,1768.45 424.6,1768.45 437.01,1780.87 D133.2 ; C315.2 561.03,2572.83 v1(566.93,2578.74) ; D135.2 637.54,1323.96 642.42,1328.84 v1(650.29,1336.71) ; T34.2 637.92,1653.42 645.67,1645.67 v1(657.48,1645.67)
  Bot w8: v1(47.24,1685.04) 47.24,1679.38 55.12,1671.5 42.41,1658.8 47.24,1653.96 C312.1 ; C310.1@228.35,2013.78 229.08,2013.05 276.83,2013.05 IC106.5 364.17,2013.78 v1(374.02,2003.94) 383.86,1994.1 IC106.21 ; C311.1 228.35,2253.94 238.19,2263.78 v1(260.37,2263.78) ; C314.1 C313.1 ; C314.1 259.21,1780.87 IC108.3@276.39,1780.87 ; IC108.3@298.75,1786.94 304.92,1793.11 v1(326.77,1793.11) ; D131.2 558.73,1989.71 561.15,1992.12 v1(562.99,1992.12) ; J109.6 587.4,2106.3 591.33,2102.36 v1(625.98,2102.36) ; C309.2 585.24,1206.1 586.61,1207.48 v1(586.61,1208.66) ; v1(635.83,472.44) C308.2 ; 642.42,1328.84 648.43,1322.83 746.85,1322.83 787.43,1322.83 798.03,1333.44 D134.2 ; v1(649.61,580.68) T32.2 ; T31.2 657.81,996.06 v1(681.5,996.06) ; IC27.1 703.08,1966.86 713.35,1956.6 v1(726.72,1956.6) ; v1(728.35,1827.52) 728.67,1827.2 IC27.7 ; IC27.2 728.67,1958.55 v1(726.72,1956.6) ; IC27.3 754.26,1964.15 ; IC27.4 779.85,1964.36 779.64,1964.15 754.26,1964.15 ; v1(799.21,1500) 810.51,1500 813.78,1503.26 R448.1@813.78,1519.69 ; v1(726.72,1956.6) 746.72,1956.6 754.26,1964.15
  Bot w30: J112.9@232.28,2413.81 254.25,2435.78 254.25,2438.56 263.78,2448.08 v2(263.78,2452.75) ; v1(326.57,2535.63) IC107.5 ; v2(523.62,2452.75) 562.99,2413.38 681.1,2413.38 J110.9@685.04,2417.32
  other v1: 320.99,1950.66 376.11,1950.66 427.29,1950.66 320.99,2001.84 427.29,2001.84 320.99,2053.02 427.29,2053.02 372.17,2056.96
LED: IC106.13 R449.1 | length 134.1
  Top w6: v1(318.9,2133.85) 324.8,2127.95 v1(381.89,2127.95)
  Bot w6: R449.1@283.46,2145.67 303.14,2145.67 314.96,2133.85 v1(318.9,2133.85) ; v1(381.89,2127.95) 382.87,2126.97 382.87,2101.38 IC106.13
MODBUS_A: D132.1 IC107.6 J110.3 J112.3 JP12.2 | length 1077
  Top w6: J112.3 216.54,2492.13 248.03,2523.62 v1(279.53,2523.62) ; v1(354.33,2437) 354.33,2492.13 377.95,2515.75 v1(377.95,2523.62) ; v1(566.93,2539.37) 568.89,2537.4 580.71,2537.4 625.98,2492.13 J110.3@669.92,2492.13 ; J110.3@653.23,2508.81 J110.3@669.92,2492.13 ; J110.3 J110.3@669.92,2492.13
  Bot w6: v1(279.53,2523.62) 306.06,2523.62 317.05,2512.63 358.63,2512.63 369.62,2523.62 v1(377.95,2523.62) ; JP12.2 299.92,2698.51 299.92,2678.04 376.57,2601.38 IC107.6 377.95,2581.3 v1(377.95,2523.62) ; D132.1 353.3,2290.31 353.3,2435.97 v1(354.33,2437) ; v1(566.93,2539.37) 551.18,2523.62 v1(377.95,2523.62)
MODBUS_B: D132.2 IC107.7 J110.5 J112.5 R452.1 | length 1218.2
  Top w6: J112.5 257.52,2334.64 263.78,2340.91 v1(263.78,2366.14) ; v1(393.7,2429.13) 421.26,2456.69 v1(421.26,2472.44) 421.26,2515.98 429.13,2523.85 v1(429.13,2543.3) ; v1(586.61,2350.39) 602.36,2334.64 J110.5
  Bot w6: v1(263.78,2366.14) 289.38,2391.75 289.38,2415.56 339.67,2465.85 374.07,2465.85 380.66,2472.44 v1(421.26,2472.44) 421.26,2468.5 426.88,2462.88 452.97,2462.88 507.39,2408.46 507.39,2394.38 551.37,2350.39 v1(586.61,2350.39) ; v1(393.7,2429.13) 393.7,2420.66 402,2412.36 402,2307.65 419.29,2290.35 D132.2 ; v1(429.13,2543.3) 429.13,2580.12 IC107.7 426.57,2601.38 470.87,2645.67 507.87,2645.67 530.56,2668.35 549.26,2668.35 568.9,2687.99 R452.1
MODBUS_DE: IC106.11 IC107.3 | length 527.6
  Bot w6: IC106.11 338.88,2106 338.88,2113.05 347.74,2121.91 347.74,2145.8 341.94,2151.6 341.94,2210.35 362.21,2230.61 427.76,2230.61 450.1,2252.96 450.1,2400.19 410.63,2439.66 408.41,2439.66 401.09,2446.97 386.31,2446.97 372.17,2432.83 372.17,2405.98 376.57,2401.57
MODBUS_DI: IC106.31 IC107.4 | length 816.8
  Top w6: v1(183.41,1925.19) 224.92,1883.69 v1(227.89,1883.69) ; v1(192.91,2165.35) v1(192.91,2203.75)
  Bot w6: v1(183.41,1925.19) 174.88,1933.72 174.88,2035.64 195.01,2055.77 195.01,2070.55 172.09,2093.47 172.09,2131.27 192.91,2152.1 v1(192.91,2165.35) ; v1(192.91,2203.75) 168.65,2203.75 156.84,2215.56 156.84,2265.2 196.66,2305.03 273.9,2305.03 281.99,2313.12 288.31,2313.12 326.57,2351.38 IC107.4 ; v1(227.89,1883.69) 245.72,1865.85 260.23,1865.85 300.69,1865.84 324.8,1889.96 IC106.31
MODBUS_R_En: IC106.10 IC107.2 | length 365.4
  Bot w6: IC106.10 327.88,2103.47 327.88,2117.61 336.74,2126.46 336.74,2141.24 330.94,2147.04 330.94,2214.9 357.65,2241.61 423.2,2241.61 439.1,2257.51 439.1,2338.85 426.57,2351.38 IC107.2
MODBUS_RO: IC106.30 R453.1 | length 876.6
  Top w6: v1(153.54,2023.62) 153.54,2070.96 241.58,2158.99 v1(359.78,2158.99) ; v1(162.48,1909.22) 162.48,1905.14 v1(204.85,1862.77)
  Bot w6: v1(153.54,2023.62) 153.54,1918.16 v1(162.48,1909.22) ; v1(204.85,1862.77) 212.77,1854.85 255.67,1854.85 305.25,1854.84 344.49,1894.09 IC106.30 ; v1(359.78,2158.99) 359.78,2165.7 362.08,2167.99 362.08,2214.93 366.77,2219.61 432.32,2219.61 470.42,2257.72 470.42,2294.73 R453.1
NetBATH6_1: BATH6.1 D136.1 T36.3 | length 1702.9
  Top w6: v1(23.62,1610.24) 55.12,1610.24 v1(62.99,1618.11) ; v1(164.49,2155.51) 164.49,2212.77 v1(174.68,2222.96) ; v1(289.38,2295.28) 307.99,2313.88 BATH6.1@374.02,2313.88 ; v1(299.21,1641.73) 295.28,1645.67 295.28,1682.68 306.6,1694 374.02,1694 446.67,1694 v1(458.91,1681.75)
  Bot w6: v1(23.62,1610.24) 23.62,1632.38 13.57,1642.44 13.57,1924.43 142.16,2053.02 150.95,2053.02 159.32,2061.4 159.32,2150.34 v1(164.49,2155.51) ; v1(62.99,1618.11) 81.68,1636.8 101.24,1636.8 112.2,1647.76 232.62,1647.76 260.18,1675.32 279.04,1675.32 289.5,1664.87 289.5,1657.75 299.21,1648.03 v1(299.21,1641.73) ; v1(174.68,2222.96) 174.68,2267.49 192.5,2285.31 279.41,2285.31 v1(289.38,2295.28) ; T36.3 382.87,1684.85 405.09,1707.06 D136.1 458.91,1707.06 v1(458.91,1681.75)
NetC311_2: C311.2 IC106.8 Q12.1 | length 391.2
  Bot w6: Q12.1 118.23,2183.19 207.07,2183.19 210.76,2179.5 ; C311.2 204.09,2242.76 204.09,2242.25 208.18,2242.25 210.11,2240.31 210.11,2236.45 215.43,2231.14 215.43,2184.17 210.76,2179.5 ; IC106.8 277.43,2072.71 209.9,2072.71 185.59,2097.02 185.59,2129.22 210.76,2154.38 210.76,2179.5
NetC312_2: C312.2 IC106.7 Q12.2 | length 535
  Bot w6: C312.2@80.71,1657.48 80.71,1771.65 Q12.2 106.3,1849.33 144.64,1887.67 169.16,1887.67 187.11,1905.61 189.06,1905.61 201.25,1917.8 201.25,1931.07 201.25,1936.16 185.88,1951.53 185.88,2010.32 229.88,2054.32 276.39,2054.32 IC106.7
NetC316_2: C316.2 D134.1 J108.1 R316.1 R454.1 | length 597.9
  Bot w6: J108.1 546.95,1330.71 546.95,1309.36 560.17,1296.13 660.86,1296.13 664.8,1292.2 688.98,1292.2 697.71,1283.46 778.83,1283.46 815.87,1320.51 815.87,1376.01 809.52,1382.36 809.52,1397.51 801.84,1397.51 D134.1 754.72,1393.7 746.85,1385.83 746.85,1424.83 756.28,1434.26 793.4,1434.26 R454.1
NetC317_2: C317.2 D135.1 J108.3 R455.1 R456.1 | length 488.8
  Bot w6: J108.3 565.65,1512.01 565.65,1466.66 607.48,1424.83 607.48,1421.26 ; D135.1 582.42,1372.87 607.48,1397.93 607.48,1421.26 ; R455.1@673.85,1432.38 648.92,1432.38 637.8,1421.26 607.48,1421.26 ; R455.1@673.85,1434.25 675.2,1434.25 677.17,1432.29 699.21,1432.29 717.24,1432.29 R456.1 717.32,1412.99 704.48,1400.15 704.48,1397.59 688.78,1381.89 C317.2 ; C317.2@687.8,1385.83 C317.2@699.61,1397.64
NetD126_1: D126.1 D127.1 D128.3 | length 404.8
  Bot w6: D127.1 665.35,905.57 751.91,992.13 755.91,992.13 761.81,998.03 761.81,1118.9 758.07,1122.64 D126.1 717.92,1122.64 700.79,1139.76 D128.3
NetD126_2: D126.2 RL9.1 T31.3 | length 554.8
  Bot w6: T31.3 618.11,940.16 644.04,966.08 702.57,966.08 714.32,977.83 714.32,1028.29 718.9,1032.87 D126.2 736.22,1058.07 689.49,1104.8 657.51,1104.8 638.65,1123.65 638.65,1155.87 650.41,1167.62 703.6,1167.62 753.54,1217.57 RL9.1
NetD127_2: D127.2 RL10.1 T32.3 | length 420
  Bot w6: T32.3 662.18,522.61 687.8,548.23 687.8,716.65 665.35,739.1 D127.2 701.11,805.51 RL10.1
NetD129_2: D129.2 D130.1 | length 40.6
  Bot w15: D130.1 D129.2
NetD130_2: D130.2 R447.2 | length 41.9
  Bot w6: R447.2 640.75,1790.35 D130.2
NetD131_1: D131.1 R451.2 T34.3 | length 469.3
  Bot w6: D131.1 569.75,1918.5 R451.2 582.89,1902.97 582.89,1832.1 596.58,1818.41 596.58,1769.45 568.77,1741.64 568.77,1726.86 599.64,1695.99 661.9,1695.99 666.59,1691.31 666.59,1691.25 689.31,1668.53 689.31,1655.06 705.18,1639.19 T34.3@734.25,1639.19
NetD137_1: D137.1 J113.2 R458.1 R459.1 R460.1 | length 334.4
  Bot w6: R460.1@32.57,1414.57 62.01,1414.57 63.18,1413.39 R458.1 ; R459.1@63.18,1340.55 R458.1 ; J113.2 204.29,1405.51 107.98,1405.51 D137.1 88.42,1403.19 R458.1
NetF1_1: F1.1 J113.1 | length 200.4
  Bot w20: F1.1 127.95,1494.09 141.73,1507.87 206.65,1507.87 J113.1
NetIC107_1: IC107.1 R453.2 | length 83.2
  Bot w6: IC107.1 476.57,2351.38 507.43,2320.52 507.43,2311.57 R453.2
NetJ110_7: J110.7 R451.1 | length 1046.4
  Top w6: v1(578.74,2511.81) 597.24,2493.3 597.24,2412.69 568.77,2384.21 568.77,2249.08 586.61,2231.24 v1(586.61,2228.34)
  Bot w6: v1(578.74,2511.81) 586.73,2519.8 586.73,2531.61 625.98,2570.87 J110.7 ; v1(586.61,2228.34) 771.16,2228.34 785.56,2213.94 785.56,2077.4 774.85,2066.68 685.54,2066.68 666.22,2047.36 666.22,2029.49 636.22,1999.48 627.36,1999.48 598.43,1970.54 R451.1
NetJP12_1: JP12.1 R452.2 | length 70.5
  Bot w6: JP12.1 454.72,2708.66 R452.2@458.66,2712.6
NetLD34_2: LD34.2 R449.2 | length 50.3
  Bot w6: LD34.2@239.17,2192.91 239.17,2172.24 246.46,2164.96 R449.2@246.46,2145.67
NetR445_2: R445.2 T31.1 | length 53.8
  Bot w6: T31.1 580.71,1037.56 R445.2
NetR446_2: R446.2 T32.1 | length 77.4
  Bot w6: T32.1 574.8,664.92 576.77,666.89 R446.2
NetR447_1: R447.1 T33.1 | length 190.6
  Bot w6: R447.1 655.02,1718.44 708.1,1665.35 757.87,1665.35 776.58,1646.65 T33.1
NetR457_1: R457.1 T35.1 T36.1 | length 266.3
  Bot w15: T35.1@424.41,1337.09 493.77,1267.72 R457.1@493.77,1258.27
  Bot w20: T36.1 424.41,1489.96 T35.1@424.41,1337.09
NetRL9_4: RL9.4 RL10.2 | length 250.2